# Altium PCB MPU6050.PcbDoc
Units mil, origin at the board's own origin, x right, y up, seen from the top; angles counter-clockwise.
Board outline 1073.57 x 836.8 mil, 2 copper layers (Top Layer, Bottom Layer); 4 components, 8 nets, 22 pads, 0 vias.
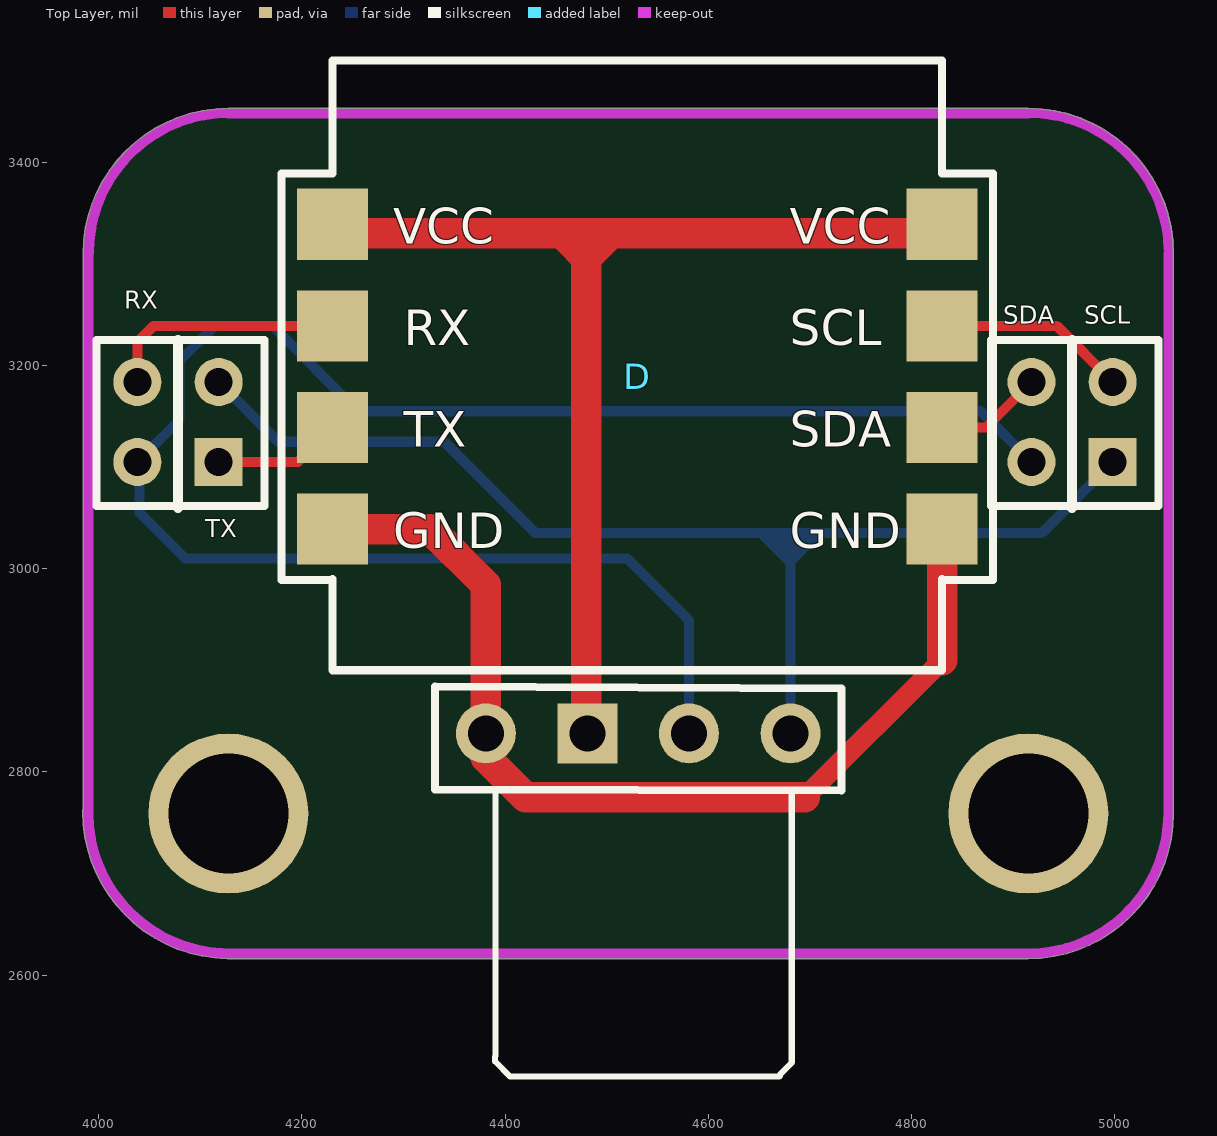
[diagram p0: Top Layer view]
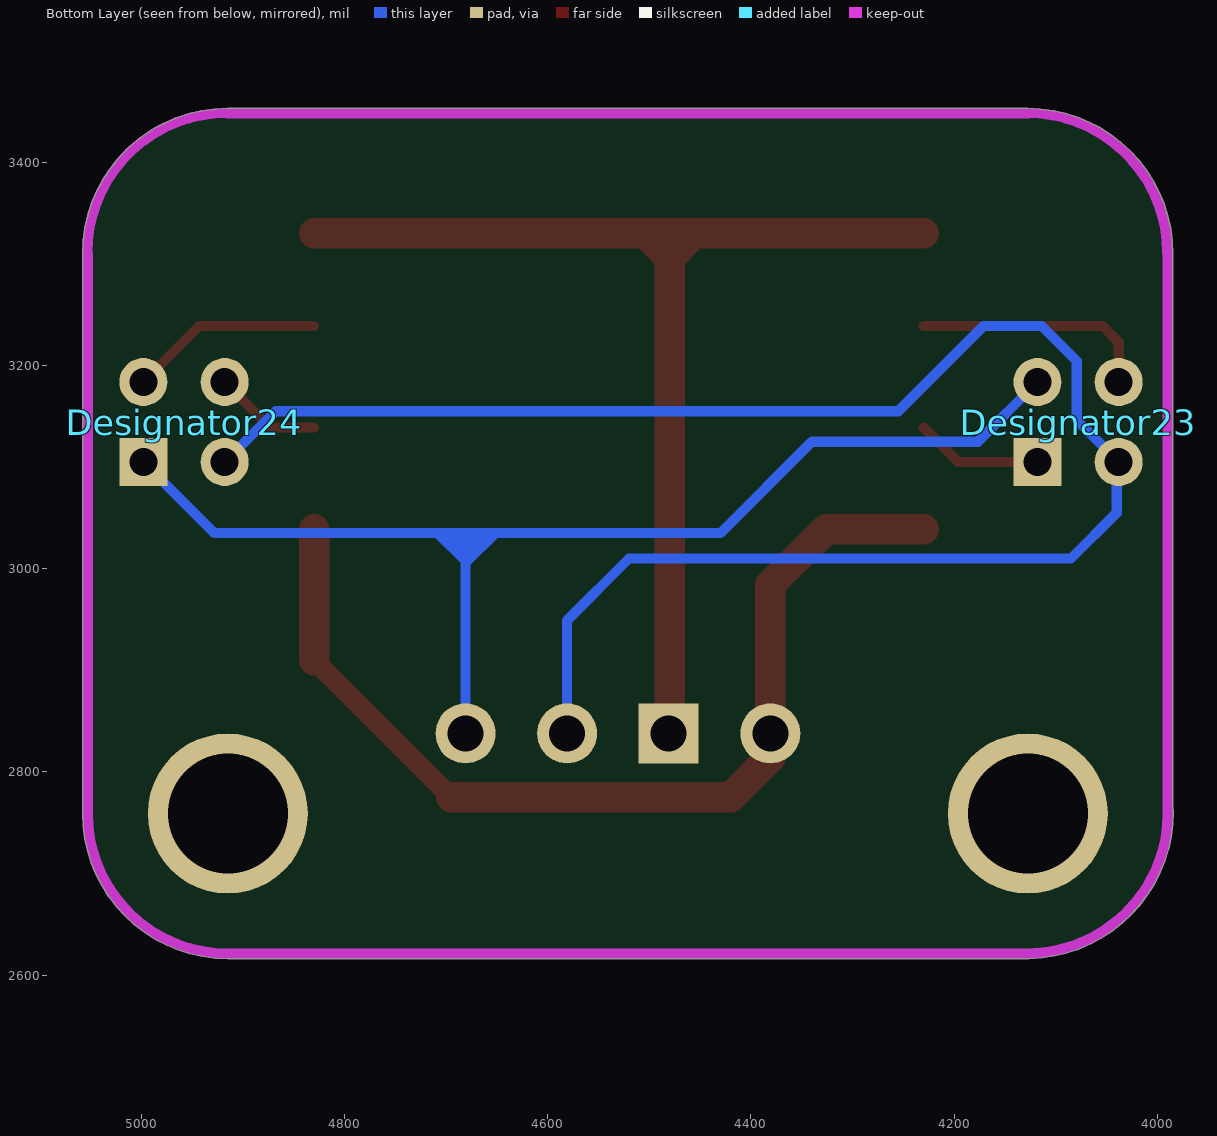
[diagram p1: Bottom Layer view, seen from below]

## Layer stack, top to bottom
Top Layer: signal copper 1.4
Dielectric: dielectric 12.6, FR-4, Dk 4.8
Bottom Layer: signal copper 1.4

## Board outline
3984.16,2761.01 ccw(c4128.94,2761.02) 4126.52,2616.26 ccw(c4127.52,2621.18) 4127.52,2616.17 4914.92,2616.17 ccw(c4914.92,2621.18) 4915.02,2616.17 ccw(c4914.92,2758.98) 5057.73,2758.98 5057.73,3310.16 ccw(c4914.92,3310.16) 4914.92,3452.97 ccw(c4914.92,3447.95) 4914.84,3452.97 4127.52,3452.97 ccw(c4127.52,3310.16) 3984.71,3310.16 3984.71,2763.29 ccw(c3989.17,2761.01)

## Design rules (kind name [scope] priority, off if disabled: settings)
Clearance [All] p1: gap=10
ComponentClearance [All] p1: gap=10 collisioncheckmode=3 verticalgap=10
PolygonConnect [All] p1: connectstyle=Relief reliefconductorwidth=10 reliefentries=4 polygonreliefangle="90 Angle"
RoutingVias [All] p1: holewidth=28 width=50 viastyle="Through Hole" minholewidth=28 minwidth=50 maxholewidth=28 maxwidth=50
SolderMaskExpansion [All] p1: expansion=4
TestPointUsage [All] p1: valid=0 allowmultiple=FALSE
Testpoint [All] p1: side=15 testpointundercomponent=TRUE minsize=40 maxsize=100 preferedsize=60 minholesize=0 maxholesize=40 preferedholesize=32 testpointgrid=1 style=1023 order=0-112345678
Width [All] p1: maxlimit=10 minlimit=10 preferedwidth=10
18 further rules are at their usual default settings.

## Components (designator, comment, footprint, x,y, rotation, side; value= is the part's Value field where it differs from the comment)
D "Comment" MPU6050Module 4180,2900 r0 top
Designator23 "Comment" dip2*2L 4000,3060 r90 bottom
Designator24 "Comment" dip2*2L 4880,3060 r90 bottom
JP1 "Header 4" HDR1X4 4380.91,2831.89 r0 top locked

## Footprints (in the part's own frame and the unit in brackets; to place one, negate y for a bottom-side part, rotate by r counter-clockwise, add the part's x,y. Pads: shape width x height; smd on the part's side, far side on the other; paste and mask are expansions set on the pad)
dip2*2L [mm]
  rect 1.2x1.2 hole 0.7: 1(1.143,2.997)
  round 1.2 hole 0.7: 2(3.143,2.997) 3(3.143,0.965) 4(1.143,0.965)
HDR1X4 [mm]
  round 1.5 hole 0.9: 1(0,0.15) 3(5.08,0.15)
  rect 1.5x1.5 hole 0.9: 2(2.54,0.15)
  round 1.5 hole 0.9 mask+0.102: 4(7.62,0.15)
  silkscreen extent -1.27,-1.27 8.89,1.32
MPU6050Module [mil]
  rect 70x70 smd: 1(50,439) 2(50,339) 3(50,239) 4(50,139) 5(650,139) 6(650,239) 7(650,339) 8(650,439)
  silkscreen extent 0,0 700,600

## Part data
JP1: "Header, 4-Pin"

## Free pads (board coordinates)
  round 157.48 hole 118.11: 2(4127.52,2758.98) 3(4914.92,2758.98)

## Nets (pads, with @x,y where several pads share a name; then routed paths per layer and width w, separated by ;. In a path a pad name is that pad's centre, name@x,y a point inside that pad or via, vN(x,y) a via of type N, cw(c..) or ccw(c..) an arc to the next point about the centre after c; other vN are vias at no path point)
GND: D.4 D.5 JP1.1 | length 993.9
  Top Layer w20: 4695,2775 4830,2910
  Top Layer w30: D.4 4326,3039 4380.91,2984.09 4380.91,2814.09 4420,2775 4695,2775 ; 4830,2910 D.5
RX: D.2 Designator23.3 | length 237.9
  Top Layer w10: Designator23.3 4038,3223 4054,3239 D.2
SCL: D.7 Designator24.2 | length 190.9
  Top Layer w10: D.7 4942.74,3239 Designator24.2
SDA: D.6 Designator24.3 | length 106.5
  Top Layer w10: D.6 4873.26,3139 Designator24.3
T1: Designator23.4 Designator24.4 JP1.3 | length 1766.1
  Bottom Layer w10: Designator23.4@4025,3110 Designator23.4@4030,3110 ; Designator23.4 4079.38,3146.38 4079.38,3204.38 4114,3239 4171,3239 4255,3155 4868,3155 Designator24.4 ; Designator23.4@4040,3095 4040,3055 4085,3010 4520,3010 4580.91,2949.09 JP1.3
T2: Designator23.2 Designator24.1 JP1.4 | length 1167.8
  Bottom Layer w10: Designator23.2 4176.74,3125 4340,3125 4430,3035 4928,3035 Designator24.1 ; JP1.4 4680.91,3035
TX: D.3 Designator23.1 | length 126.1
  Top Layer w10: Designator23.1 4196,3105 D.3
VCC: D.1 D.8 JP1.2 | length 1337.2
  Top Layer w10: D.1@4230,3325 4480,3325
  Top Layer w30: D.1@4230,3330 D.8@4830,3330 ; JP1.2@4480,2837.8 4480,3325

## Keep-outs
Keep-Out Layer:
  lines w10: 3989.17,2761.01 ccw(c4128.94,2761.02) 4133.14,2621.32 ; 3989.72,3310.16 3989.72,2758.98 ccw(c4127.52,2758.98) 4127.52,2621.18 4914.92,2621.18 ccw(c4914.92,2758.98) 5052.72,2758.98 5052.72,3310.16 ; 3990.28,3310.87 cw(c4128.07,3310.87) 4128.07,3448.66 ; 4127.52,3447.95 4914.92,3447.95 ; 4915.47,3448.66 cw(c4915.47,3310.87) 5053.27,3310.87

## Other copper
Top Layer:
  region net VCC: 4440,3325 4480,3285 4520,3325
Bottom Layer:
  region net T2: 4645,3035 4680,3000 4680.91,3000 4680.91,3000.91 4715,3035

## Silkscreen, mask and mechanical layers (free items; w line width, h text height)
Top Overlay:
  lines w6: 4390.43,2782.56 4390.43,2520.43 4390,2520 4390,2515 4405,2500 4670,2500 4671.2,2502.9 4682.1,2513.8 4682.1,2781.99
  text "RX" at 4025,3250 h30
  text "SDA" at 4890,3235 h30
  text "SCL" at 4970,3235 h30
  text "TX" at 4105,3025 h30

## Text inside footprints (layer, text, board x,y; h text height)
D: Top Overlay "SCL" at 4680,3220 h35; Top Overlay "SDA" at 4680,3120 h35; Top Overlay "TX" at 4300,3120 h35; Top Overlay "RX" at 4300,3220 h35; Top Overlay "GND" at 4680,3020 h35; Top Overlay "GND" at 4290,3020 h35; Top Overlay "VCC" at 4680,3320 h35; Top Overlay "VCC" at 4290,3320 h35